# Altium PCB ESC_30A.PcbDoc
Units mm, origin at the board's own origin, x right, y up, seen from the top; angles counter-clockwise.
Board outline 42 x 24 mm, 4 copper layers (Top Layer, Signal Layer 1, Internal Plane 1, Bottom Layer), stack 1.508 mm thick; 67 components, 44 nets, 188 pads, 82 vias.
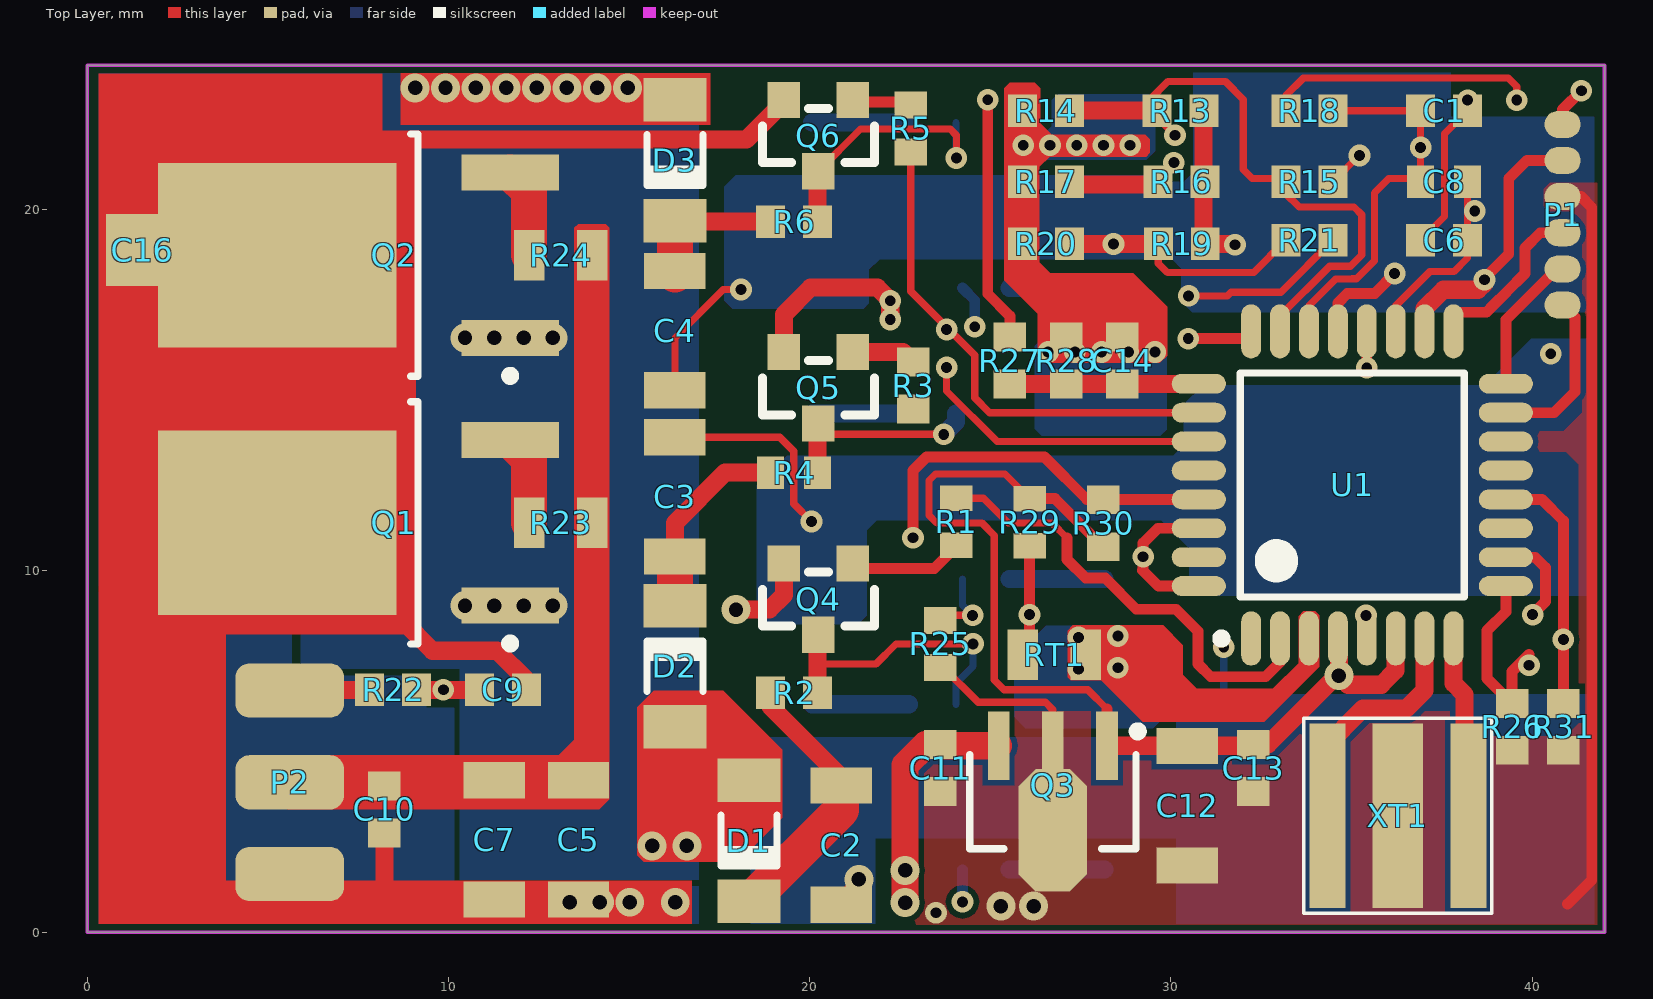
[diagram p0: Top Layer view]
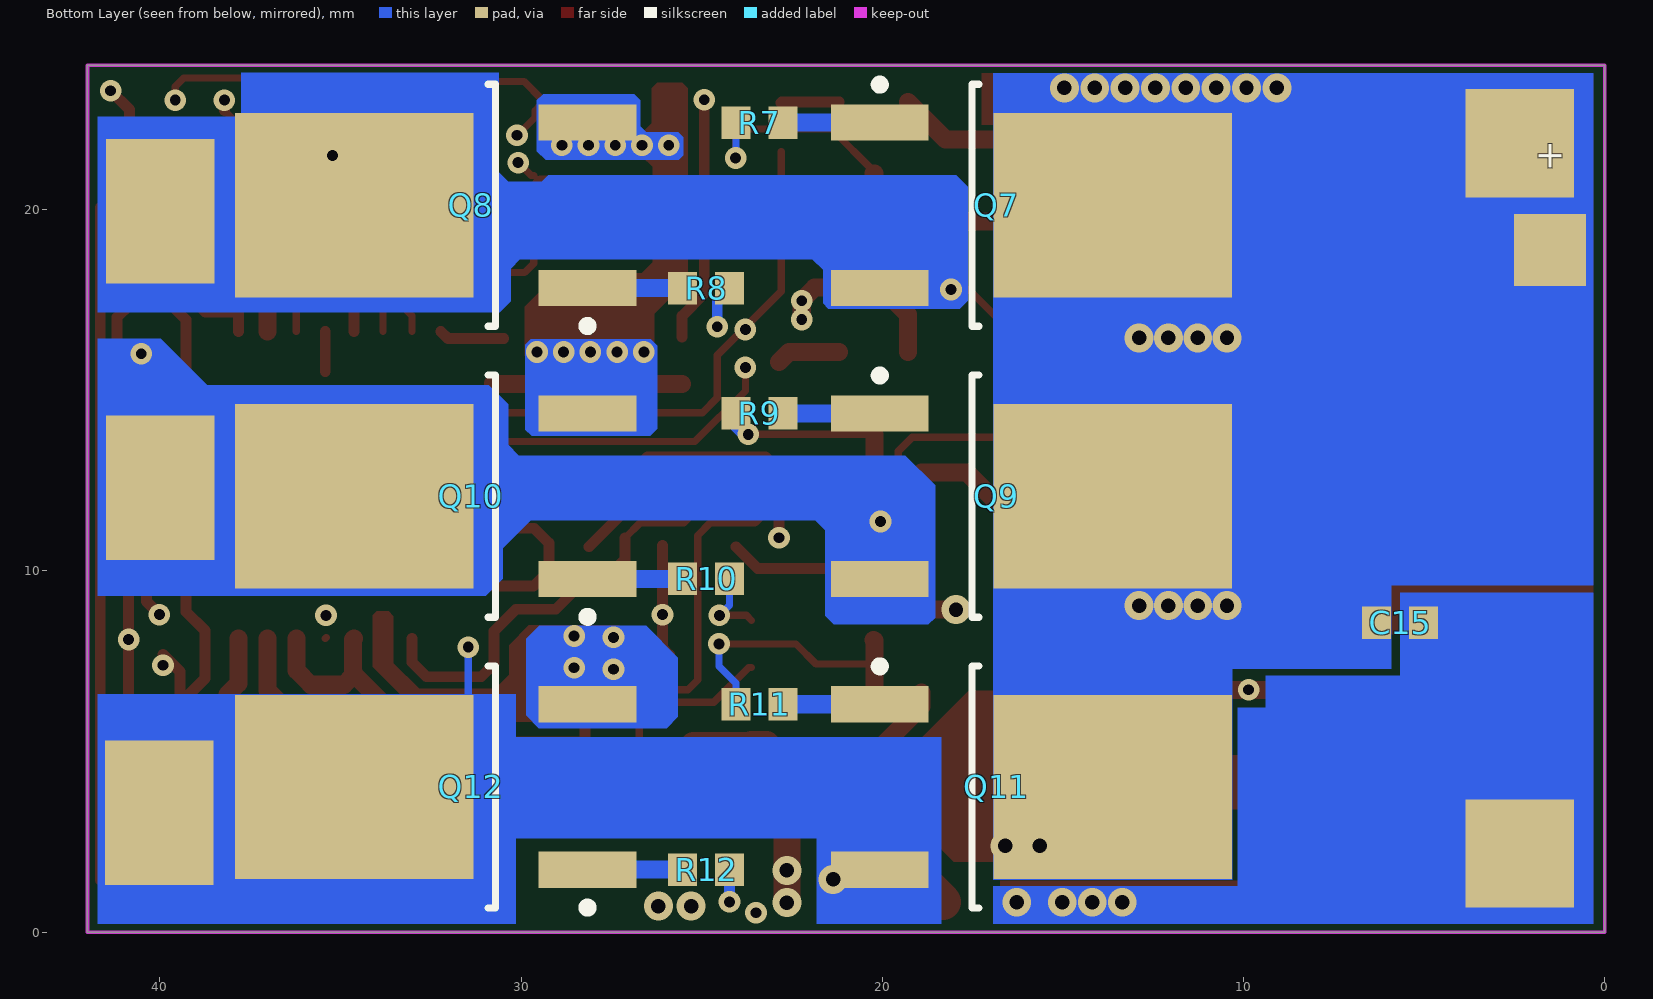
[diagram p1: Bottom Layer view, seen from below]
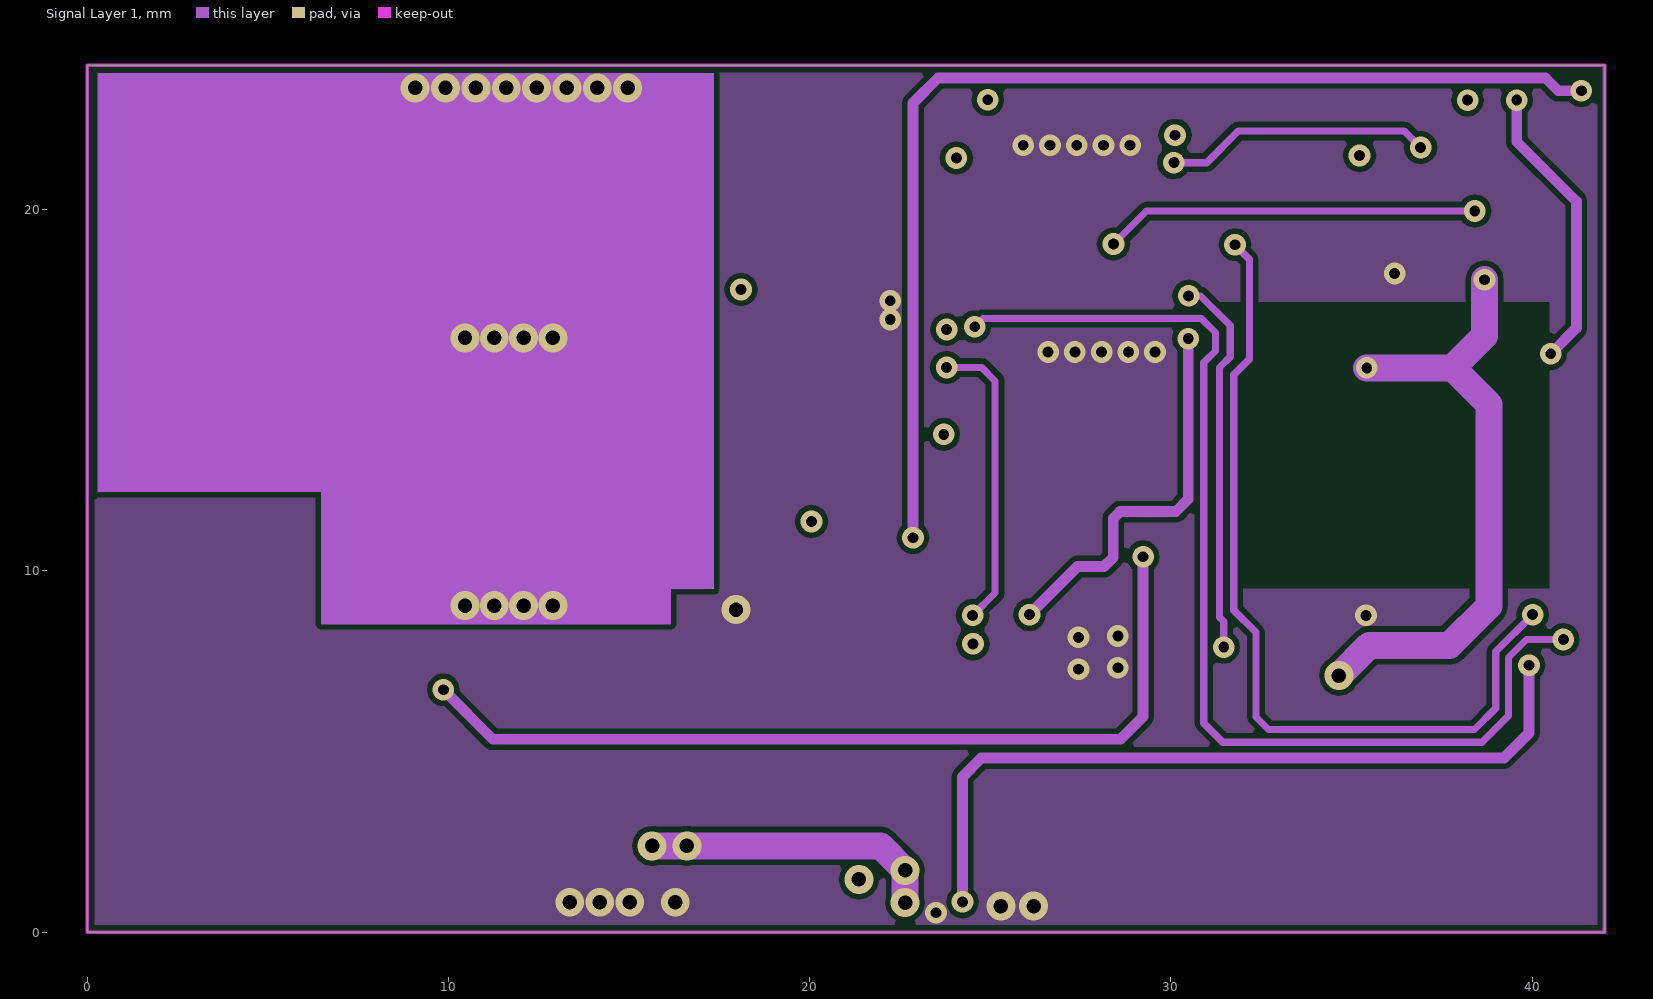
[diagram p2: Signal Layer 1]
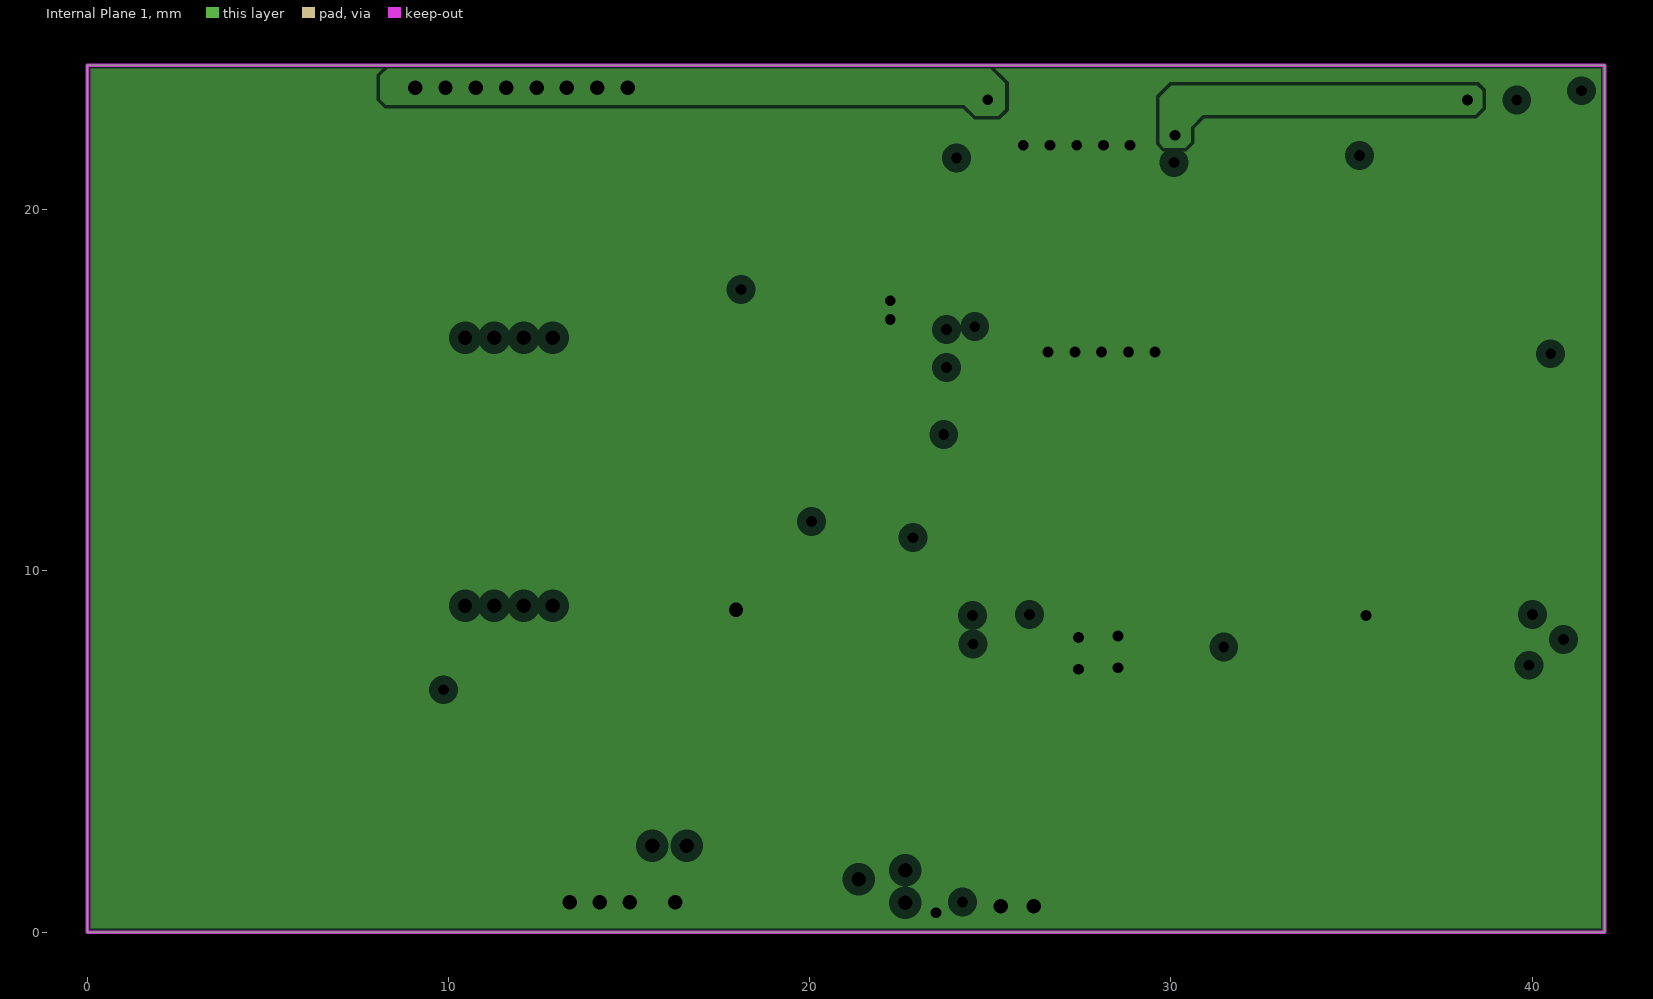
[diagram p3: Internal Plane 1, clearances drawn from the general rule]
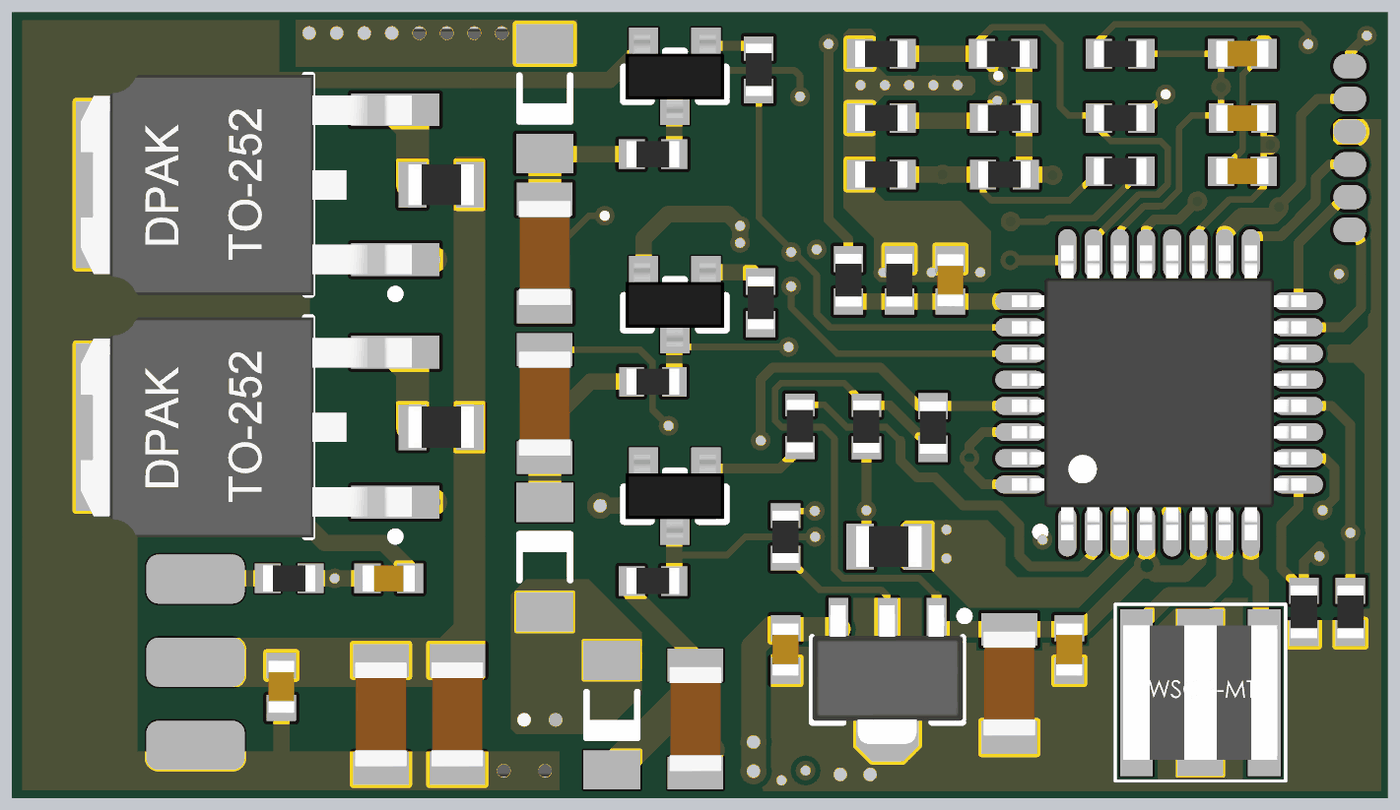
[diagram p4: 3D render of the assembled board from above, using the file's embedded part models]
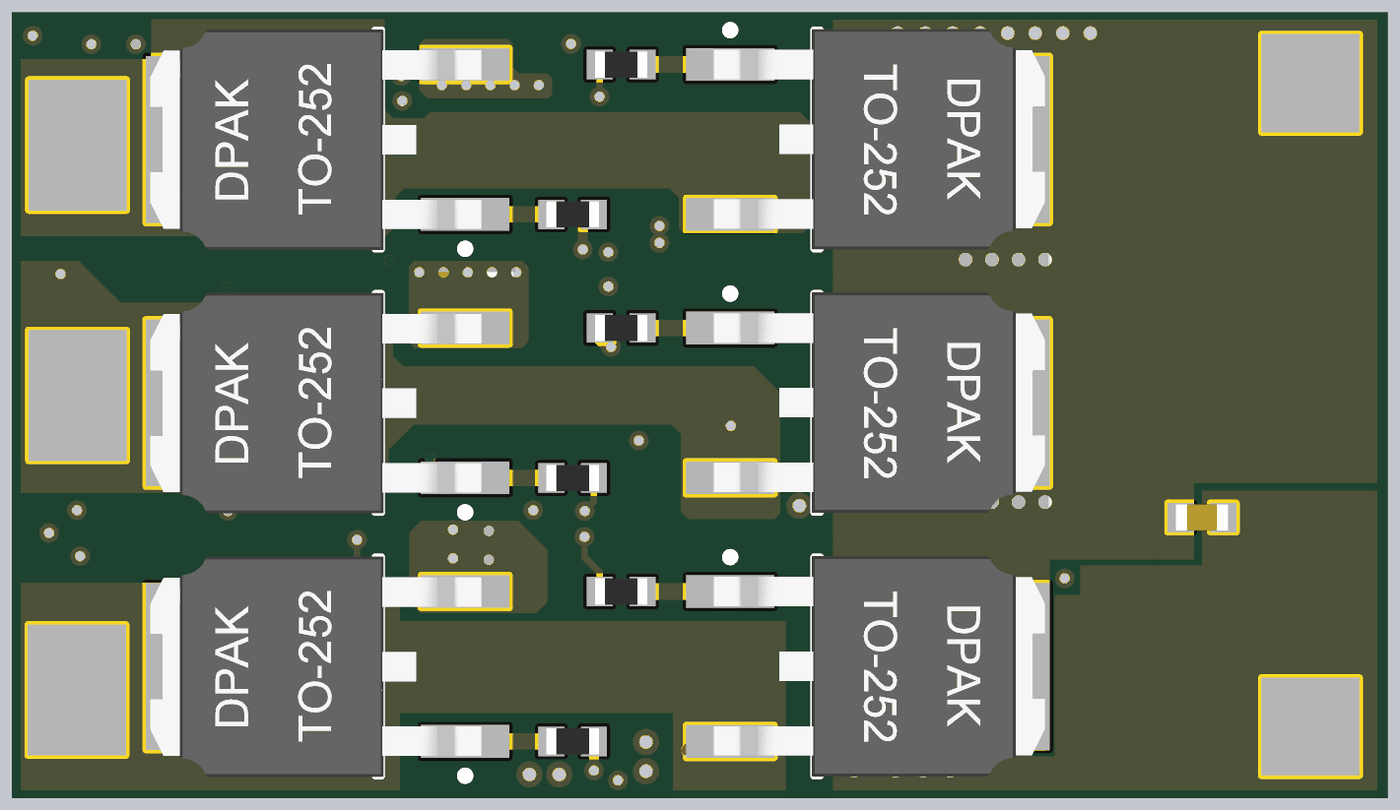
[diagram p5: 3D render of the assembled board from below, using the file's embedded part models]

## Layer stack, top to bottom
Top Solder: solder mask 0.015, Solder Resist, Dk 3.5
Top Layer: signal copper 0.018
Dielectric 1: prepreg 0.2, 7628H, Dk 4.2
Signal Layer 1: signal copper 0.036
Dielectric 3: core 1, FR-4, Dk 4.2
Internal Plane 1: plane copper 0.036, net GND
Dielectric 2: prepreg 0.2, 7628H, Dk 4.2
Bottom Layer: signal copper 0.018
Bottom Solder: solder mask 0.015, Solder Resist, Dk 3.5

## Board outline
0,0 42,0 42,24 0,24

## Design rules (kind name [scope] priority, off if disabled: settings)
BoardOutlineClearance [All] p1: gap=0.2 ignorepadtopadclearanceinfootprint=FALSE
Clearance [All] p1: gap=0.152 ignorepadtopadclearanceinfootprint=FALSE
PlaneClearance [All] p1: clearance=0.25
PlaneConnect [All] p1: planeconnectstyle=Direct reliefexpansion=0.508 reliefentries=4 reliefconductorwidth=0.254 reliefairgap=0.254
PolygonConnect [All] p1: connectstyle=Direct reliefconductorwidth=0.254 reliefentries=4 polygonreliefangle="90 Angle" airgapwidth=0.254
RoutingVias [All] p1: holewidth=0.3 width=0.6 viastyle="Through Hole" minholewidth=0.3 minwidth=0.6 maxholewidth=0.4 maxwidth=0.8
SolderMaskExpansion [All] p1: expansion=0.102
Width [All] p1 off: maxlimit=0.254 minlimit=0.254 preferedwidth=0.254
28 further rules are at their usual default settings.

## Components (designator, comment, footprint, x,y, rotation, side; value= is the part's Value field where it differs from the comment)
C1 "1nF" C0603(1608)#1 37.56,22.74 r180 top
C2 "5uF" C1206(3216)#1 20.87,2.41 r90 top
C3 "5uF" C1206(3216)#1 16.27,12.05 r270 top
C4 "5uF" C1206(3216)#2 16.27,16.65 r90 top
C5 "10uF" C1206(3216)#2 13.6,2.557 r90 top
C6 "1nF" C0603(1608)#1 37.56,19.15 r0 top
C7 "10uF" C1206(3216)#2 11.27,2.557 r90 top
C8 "1nF" C0603(1608)#2 37.56,20.775 r0 top
C9 "470pF" C0603(1608)#1 11.51,6.71 r180 top
C10 "100nF" C0603(1608)#1 8.23,3.4 r90 top
C11 "100nF" C0603(1608)#1 23.62,4.54 r90 top
C12 "10uF" C1206(3216)#2 30.45,3.5 r90 top
C13 "100nF" C0603(1608)#1 32.28,4.54 r90 top
C14 "100nF" C0603(1608)#1 28.65,15.82 r270 top
C15 "100nF" C0603(1608)#1 5.67,8.57 r0 bottom
C16 "470uF/25V" RB.2/.4N -9.49,17.13 r0 top
D1 "1N4148W" DIOMELF3515N#1 18.32,2.535 r90 top
D2 "1N4148W" DIOMELF3515N#1 16.27,7.36 r270 top
D3 "1N4148W" DIOMELF3515N#2 16.27,21.37 r90 top
P1 "ISP" SWD-PAD_6 40.84,19.86 r270 top
P2 "CONTROL" "Pin Header 1x3 TH Pitch 2.54mm" 5.61,6.69 r0 top
Q1 "L78M05CDT" DPAK229P1010X238-3N 7.51,11.33 r180 top
Q2 "L78M05CDT" DPAK229P1010X238-3N 7.51,18.74 r180 top
Q3 "L78L05ABUTR" SOT89-150P409X160-3N 26.73,3.61 r270 top
Q4 "MMBT3904L" SOT23-A 20.24,9.22 r180 top value=BC817
Q5 "MMBT3904L" SOT23-A 20.24,15.07 r180 top value=BC817
Q6 "MMBT3904L" SOT23-A 20.24,22.05 r180 top value=BC817
Q7 "M3016D" DPAK229P1010X238-3N 15.87,20.12 r180 bottom value=DMN10H099SK3-13
Q8 "M3016D" DPAK229P1010X238-3N 32.36,20.12 r0 bottom value=DMN10H099SK3-13
Q9 "M3016D" DPAK229P1010X238-3N 15.87,12.07 r180 bottom value=DMN10H099SK3-13
Q10 "M3016D" DPAK229P1010X238-3N 32.36,12.07 r0 bottom value=DMN10H099SK3-13
Q11 "M3016D" DPAK229P1010X238-3N 15.87,4.02 r180 bottom value=DMN10H099SK3-13
Q12 "M3016D" DPAK229P1010X238-3N 32.36,4.02 r0 bottom value=DMN10H099SK3-13
R1 "4K7" R0603(1608)#1 24.06,11.36 r270 top
R2 "2K2" R0603(1608)#2 19.57,6.63 r0 top
R3 "4K7" R0603(1608)#2 22.86,15.13 r90 top
R4 "2K2" R0603(1608)#3 19.57,12.72 r0 top
R5 "4K7" R0603(1608)#3 22.8,22.25 r90 top
R6 "2K2" R0603(1608)#2 19.57,19.67 r0 top
R7 "100R" R0603(1608)#2 23.4,22.41 r180 bottom
R8 "100R" R0603(1608)#2 24.88,17.83 r0 bottom
R9 "100R" R0603(1608)#2 23.4,14.36 r180 bottom
R10 "100R" R0603(1608)#2 24.88,9.78 r0 bottom
R11 "100R" R0603(1608)#2 23.4,6.31 r180 bottom
R12 "100R" R0603(1608)#2 24.88,1.73 r0 bottom
R13 "3K3" R0603(1608)#2 30.26,22.74 r180 top
R14 "3K3" R0603(1608)#2 26.54,22.74 r0 top
R15 "18K" R0603(1608)#2 33.83,20.775 r180 top
R16 "3K3" R0603(1608)#2 30.29,20.775 r180 top
R17 "3K3" R0603(1608)#2 26.54,20.775 r0 top
R18 "18K" R0603(1608)#2 33.83,22.74 r0 top
R19 "3K3" R0603(1608)#2 30.3,19.05 r180 top
R20 "3K3" R0603(1608)#2 26.54,19.05 r0 top
R21 "18K" R0603(1608)#2 33.83,19.15 r180 top
R22 "220R" R0603(1608)#4 8.47,6.71 r180 top
R23 "0R22" R0805(2012) 13.11,11.33 r0 top
R24 "0R22" R0805(2012) 13.11,18.74 r0 top
R25 "10K" R0603(1608)#3 23.62,7.98 r270 top
R26 "10K" R0603(1608)#2 39.44,5.685 r270 top
R27 "220K" R0603(1608)#2 25.54,15.82 r90 top
R28 "51K" R0603(1608)#2 27.095,15.82 r270 top
R29 "820R" R0603(1608)#1 26.085,11.35 r90 top
R30 "10K" R0603(1608)#2 28.12,11.32 r270 top
R31 "10K" R0603(1608)#2 40.86,5.685 r270 top
RT1 "10K_NTC" R0805(2012) 26.77,7.68 r0 top
U1 "ATMEGA8L-8AUR" TQFP80P900X900X120-32N 35.02,12.38 r90 top
XT1 "AWSCR-16.00MTD-T" XTAL_AWSCR 34.33,3.22 r0 top

## Footprints (in the part's own frame and the unit in brackets; to place one, negate y for a bottom-side part, rotate by r counter-clockwise, add the part's x,y. Pads: shape width x height; smd on the part's side, far side on the other; paste and mask are expansions set on the pad)
C0603(1608)#1 [mm] "Chip Capacitor, Body 1.0x0.5mm, Height 0.6mm, IPC Low Density"
  rect 0.8x0.9 smd: 1(-0.65,0) 2(0.65,0)
  body extent -0.8,-0.4 0.8,0.4, height 0.9
C0603(1608)#2 [mm] "Chip Capacitor, Body 1.0x0.5mm, Height 0.6mm, IPC Low Density"
  rect 0.75x0.9 smd: 1(-0.65,0) 2(0.65,0)
  body extent -0.8,-0.4 0.8,0.4, height 0.9
C1206(3216)#1 [mm] "Chip Capacitor, Body 1.0x0.5mm, Height 0.6mm, IPC Low Density"
  rect 1x1.7 smd mask+0.05: 1(-1.65,0) 2(1.65,0)
  body extent -1.6,-0.8 1.6,0.8, height 1.6
C1206(3216)#2 [mm] "Chip Capacitor, Body 1.0x0.5mm, Height 0.6mm, IPC Low Density"
  rect 1x1.7 smd: 1(-1.65,0) 2(1.65,0)
  body extent -1.6,-0.8 1.6,0.8, height 1.6
DIOMELF3515N#1 [mm] "MELF Diode, 2-Leads, Body 3.50x1.50mm, IPC Medium Density"
  rect 1.2x1.75 smd mask+0.05: 1(-1.675,0) 2(1.675,0)
  silkscreen extent -0.7,-0.78 0.7,0.77, body extent -1.85,-0.8 1.85,0.8, height 1.59
DIOMELF3515N#2 [mm] "MELF Diode, 2-Leads, Body 3.50x1.50mm, IPC Medium Density"
  rect 1.2x1.75 smd: 1(-1.675,0) 2(1.675,0)
  silkscreen extent -0.7,-0.78 0.7,0.77, body extent -1.85,-0.8 1.85,0.8, height 1.59
DPAK229P1010X238-3N [mm] "D-PAK, 3-Pads, Body 6.20x6.71mm (max), IPC Medium Density"
  rect 2.7x1 smd: 1(-4.2,2.29) 3(-4.2,-2.29)
  rect 6.6x5.1 smd: 2(2.25,0)
  silkscreen extent -4.33,-3.35 -1.45,3.46, body extent -4.69,-3.36 5.41,3.37, height 2.37
"Pin Header 1x3 TH Pitch 2.54mm" [mm] "PinHeader 1x1 TH Pitch 2.54mm"
  rrect50% 3x1.5 smd mask+0.05: 1(0,0) 2(0,-2.54) 3(0,-5.08)
R0603(1608)#1 [mm] "Chip Capacitor, Body 1.0x0.5mm, Height 0.6mm, IPC Low Density"
  rect 0.7x0.9 smd: 1(-0.65,0) 2(0.65,0)
  body extent -0.8,-0.4 0.8,0.4, height 0.45
R0603(1608)#2 [mm] "Chip Capacitor, Body 1.0x0.5mm, Height 0.6mm, IPC Low Density"
  rect 0.8x0.9 smd: 1(-0.65,0) 2(0.65,0)
  body extent -0.8,-0.4 0.8,0.4, height 0.45
R0603(1608)#3 [mm] "Chip Capacitor, Body 1.0x0.5mm, Height 0.6mm, IPC Low Density"
  rect 0.75x0.9 smd: 1(-0.65,0) 2(0.65,0)
  body extent -0.8,-0.4 0.8,0.4, height 0.45
R0603(1608)#4 [mm] "Chip Capacitor, Body 1.0x0.5mm, Height 0.6mm, IPC Low Density"
  rect 0.8x0.9 smd mask+0.05: 1(-0.65,0) 2(0.65,0)
  body extent -0.8,-0.4 0.8,0.4, height 0.45
R0805(2012) [mm] "Chip Capacitor, Body 1.0x0.5mm, Height 0.6mm, IPC Low Density"
  rect 0.85x1.4 smd: 1(-0.875,0) 2(0.875,0)
  body extent -1,-0.62 1,0.63, height 0.6
RB.2/.4N [mm]
  rect 2x2 smd far side: 1(11.01,1.75)
  rect 2x2 smd: 2(11.01,1.75)
  body extent -0.65,-12.66 9.35,1.84, height 4.25
SOT23-A [mm] "SOT-23; 3 Leads; Body 3.0 x 2.5 mm, inc. leads (LxW max), Alternate Lead Configuration"
  rect 0.9x1 smd mask+0.05: 1(-0.953,-0.988) 2(0.954,-0.988) 3(0,0.988)
  silkscreen extent -1.55,-0.75 1.55,0.75, body extent -1.5,-1.27 1.5,1.27, height 1.1
SOT89-150P409X160-3N [mm] "SOT89, 3-Leads, Body 4,5x2,4mm (max), Pitch 1,50mm, Lead Span 4,1mm, IPC Medium Density"
  rect 1.9x0.6 smd: 1(-1.55,1.5) 3(-1.55,-1.5)
  rect 1.6x0.6 smd: 2(-1.7,0)
  oct 3.4x1.9 smd: 2(0.79,0)
  silkscreen extent -2.07,-2.3 1.3,2.48, body extent -2.29,-2.3 1.96,2.3, height 1.59
SWD-PAD_6 [mm]
  oval 0.75x1 smd: 1(-2.5,0) 2(-1.5,0) 3(-0.5,0) 4(0.5,0) 5(1.5,0) 6(2.5,0)
TQFP80P900X900X120-32N [mm] "TQFP, 32-Leads, Body 7.00x7.00mm, Pitch 0.80mm, IPC Medium Density"
  oval 1.5x0.55 smd: 1(-4.25,2.8) 2(-4.25,2) 3(-4.25,1.2) 4(-4.25,0.4) 5(-4.25,-0.4) 6(-4.25,-1.2) 7(-4.25,-2) 8(-4.25,-2.8) 17(4.25,-2.8) 18(4.25,-2) 19(4.25,-1.2) 20(4.25,-0.4) 21(4.25,0.4) 22(4.25,1.2) 23(4.25,2) 24(4.25,2.8)
  oval 0.55x1.5 smd: 9(-2.8,-4.25) 10(-2,-4.25) 11(-1.2,-4.25) 12(-0.4,-4.25) 13(0.4,-4.25) 14(1.2,-4.25) 15(2,-4.25) 16(2.8,-4.25) 25(2.8,4.25) 26(2,4.25) 27(1.2,4.25) 28(0.4,4.25) 29(-0.4,4.25) 30(-1.2,4.25) 31(-2,4.25) 32(-2.8,4.25)
  silkscreen extent -4.37,-3.1 3.1,3.75, body extent -4.5,-4.5 4.5,4.5, height 1.2
XTAL_AWSCR [mm]
  rect 1x5.1 smd mask+0.05: 1(0,0) 3(3.9,0)
  rect 1.4x5.1 smd mask+0.05: 2(1.95,0)
  silkscreen extent -0.65,-2.7 4.55,2.7, body extent -0.4,-2.05 4.3,2.06, height 1.51

## Part data
C1 C2 C3 C4 C5 C6 C7 C8 C9 C10 C11 C12 C13 C14 C15: library part Cap, "Capacitor"
C16: library part "Cap Pol1", "CAP ALUM 470UF 20% 25V RADIAL"
D1 D2 D3: library part Diode, "Default Diode", Code_JEDEC=DO-214-AB, LatestRevisionDate=17-Jul-2002, LatestRevisionNote="Re-released for DXP Platform.", PackageDescription="DO-214-AB/SMC; 2 C-Bend Leads; Body 7.9 x 5.9 mm, inc. leads (LxW)", PackageReference=SMC, PackageVersion=Sep-1996, Published=8-Jun-2000, Publisher="Altium Limited"
P1: library part "Header 6", "Header, 6-Pin", LatestRevisionDate=17-Jul-2002, LatestRevisionNote="Re-released for DXP Platform.", Publisher="Altium Limited"
P2: library part "Header 3", "Header, 3-Pin", LatestRevisionDate=17-Jul-2002, LatestRevisionNote="Re-released for DXP Platform.", Publisher="Altium Limited"
Q1 Q2: library part 78M05, "IC REG LINEAR 5V 500MA DPAK"
Q3: library part 78L05, "IC REG LINEAR 5V 100MA SOT89-3"
Q4 Q5 Q6: "TRANS NPN 40V 0.2A SOT23", ComponentLink4Description=BC817-40, ComponentLink5Description=BC817-40LT1G, DepoStok=48430.00000, EK1=45V, EK2=500mA, Kilif=SOT-23, Marka_1=PHILIPS, Marka_2=NXP, Marka_3=On-Semiconductor, Max_Fiyat=0.100, Min_Fiyat=0.029, ModelNo_1=BC817-40, ModelNo_2=BC817-40, ModelNo_3=BC817-40LT1G, Montaj=SMD, Ongoru_Fiyat=0.032, Ort_Fiyat=0.052, Sinif=TRANS, Stok Kodu=265402, Tipi=NPN
Q7 Q8 Q9 Q10 Q11 Q12: "N-Ch 30V Fast Switching MOSFETs", ComponentLink3Description=DMN10H099SK3-13, DepoStok=44.00000, EK1=100V, EK2=17A, Kilif=D-PAK, Marka_1=DIODES, Max_Fiyat=1.488, Min_Fiyat=1.488, ModelNo_1=DMN10H099SK3-13, Montaj=SMD, Ort_Fiyat=1.488, Sinif=TRANS, Stok Kodu=266751, Tipi=N-MOS
R1 R2 R3 R4 R5 R6 R7 R8 R9 R10 R11 R12 R13 R14 R15 R16 R17 R18 R19 R20 R21 R22 R23 R24 R25 R26 R27 R28 R29 R30 R31: library part R, "Resistor"
RT1: library part "Res Thermal", "Thermistor", Code_IPC=RESC2012, LatestRevisionDate=29-May-2009, LatestRevisionNote="IPC-7351 Footprint Added.", PackageDescription="Chip Resistor 0805 Case Size", PackageReference=6-0805, PackageVersion=Mar-2003, Published=24-Mar-1999, Publisher="Altium Limited"
U1: library part ATMEGA8L, "IC MCU 8BIT 8KB FLASH 32TQFP"
XT1: library part XTAL_RESONATOR, "CER RES 16.0000MHZ 22PF SMD"

## Free pads (board coordinates)
  rect 3x3 smd far side: 1(2.36,2.18) 1(2.36,21.84)
  rect 3x4 smd far side: 1(39.99,12.3) 1(39.99,19.95) 1(40.01,3.3)

## Via types
v1: diameter 0.6, hole 0.3, Top Layer to Bottom Layer, tented both sides, 43 vias
v2: diameter 0.8, hole 0.4, Top Layer to Bottom Layer, tented both sides, 28 vias
v3: diameter 0.6, hole 0.3, Top Layer to Signal Layer 1, tented both sides, 10 vias
v4: diameter 0.8, hole 0.4, Top Layer to Signal Layer 1, tented both sides, 1 vias

## Nets (pads, with @x,y where several pads share a name; then routed paths per layer and width w, separated by ;. In a path a pad name is that pad's centre, name@x,y a point inside that pad or via, vN(x,y) a via of type N, cw(c..) or ccw(c..) an arc to the next point about the centre after c; other vN are vias at no path point)
+5V: C12.2 C13.2 P1.2 Q3.1 R29.2 R30.2 U1.4 U1.6 U1.18 U1.20 | length 53.6
  Top Layer w0.2: R29.2 25.405,12.68 23.48,12.68 23.3,12.5 23.3,11.539 23.496,11.343 23.507,11.343 23.52,11.33 24.761,11.33 25.11,10.981 25.11,6.984 25.38,6.714 27.696,6.714 28.23,6.18
  Top Layer w0.3: R29.2@26.235,12 26.79,12 R30.2 ; Q3.1 28.23,6.18 ; v3@35.42,15.52 v3(35.42,15.62) U1.20 ; v3(38.68,18.06) 38.68,18.103 39.35,18.773 39.35,20.86 39.85,21.36 P1.2
  Top Layer w0.5: Q3.1 30.45,5.16 32.25,5.16 C13.2 32.678,5.19 34.588,7.1 v4(34.65,7.1) ; U1.4 34.65,8.1 v4(34.65,7.1) ; U1.6 36.22,7.25 35.82,6.85 34.902,6.85 34.652,7.1 v4(34.65,7.1) ; U1.18 37.02,17.262 37.54,17.782 38.502,17.782 v3@38.68,17.96
  Signal Layer 1 w0.75: v4(34.65,7.1) 35.49,7.94 37.71,7.94 38.8,9.03 38.8,14.61 37.79,15.62 ; v3(35.42,15.62) 37.79,15.62 ; v3(38.68,18.06) 38.68,16.51 37.79,15.62
A+: R5.1 U1.26 | length 13.9
  Top Layer w0.2: R5.1 22.8,17.74 24.57,15.97 24.57,14.79 24.98,14.38 U1.26
  other v1: 23.79,16.68
A-: R8.1 R31.1 U1.12 | length 38.3
  Top Layer w0.3: U1.12 40.27,11.98 40.86,11.39 v1(40.86,8.1) R31.1
  Signal Layer 1 w0.2: v1(24.57,16.76) 24.8,16.99 30.84,16.99 31.23,16.6 31.23,16.09 30.908,15.768 30.908,5.782 31.432,5.258 38.608,5.258 39.342,5.992 39.342,7.603 39.839,8.1 v1(40.86,8.1)
  Bottom Layer w0.3: R8.1 24.57,17.49 v1(24.57,16.76) v1@24.6,16.73
ADC1: R29.1 RT1.1 U1.24 | length 15.7
  Top Layer w0.3: RT1.1 26.085,7.87 v1(26.085,8.79) R29.1 ; v3(30.48,16.43) 32.02,16.43 U1.24
  Signal Layer 1 w0.3: v1(26.085,8.79) 27.415,10.12 28.15,10.12 28.4,10.37 28.4,11.45 28.59,11.64 30.13,11.64 30.48,11.99 v3(30.48,16.43)
ADC2: C14.2 R27.1 R28.2 U1.25 | length 5.2
  Top Layer w0.5: R27.1 R28.2 C14.2 30.76,15.17 U1.25
B+: R3.1 U1.28
B-: R10.1 R25.1 U1.27 | length 18.5
  Top Layer w0.2: R25.1 23.76,8.77 v1(24.51,8.77) v1@24.52,8.78 ; v1(23.79,15.63) 23.79,14.98 25.19,13.58 U1.27
  Signal Layer 1 w0.2: v1(23.79,15.63) 24.76,15.63 25.13,15.26 25.13,9.39 v1(24.51,8.77)
  Bottom Layer w0.2: R10.1 24.23,9.05 v1(24.51,8.77)
C+: R1.1 U1.2 | length 12.7
  Top Layer w0.2: R1.1 24.81,12.01 25.49,11.33 26.7,11.33 27.12,10.91
  Top Layer w0.3: 27.12,10.91 27.12,10.32 27.64,9.8 28.18,9.8 29.04,8.94 30.14,8.94 30.75,8.33 30.75,7.42 31.1,7.07 32.62,7.07 33.02,7.47 U1.2
C-: R12.1 R26.1 U1.9 | length 27.7
  Top Layer w0.3: U1.9 39.27,8.87 38.75,8.35 38.75,7.025 R26.1 39.44,7.22 39.91,7.69
  Signal Layer 1 w0.3: v1(24.23,0.84) 24.23,4.3 24.75,4.82 39.22,4.82 39.91,5.51 v1(39.91,7.39)
  Bottom Layer w0.3: v1(24.23,0.84) R12.1
CENTER: R13.1 R16.1 R19.1 U1.10 | length 30.3
  Top Layer w0.2: v3@31.75,19.05 v3(31.77,19.03)
  Top Layer w0.3: U1.10 40.08,10.38 40.37,10.09 40.37,9.15 v1(40.01,8.79)
  Top Layer w0.5: R19.1@30.9,19.32 R13.1@30.9,22.44 ; R19.1 v3@31.75,19.05
  Signal Layer 1 w0.2: v3(31.77,19.03) 32.17,18.63 32.17,15.86 31.74,15.43 31.74,8.91 32.35,8.3 32.35,5.96 32.7,5.61 38.4,5.61 38.99,6.2 38.99,7.77 v1(40.01,8.79)
EXT_+5V: C5.2 C7.2 C10.2 P2.2 R23.2 R24.2
GND: C5.1 C7.1 C9.1 C10.1 C11.1 C12.1 C13.1 C14.1 C15.1 C16.2 P1.3 P2.3 pad.1@2.36,2.18 Q1.2 Q2.2 Q3.2 Q4.2 Q5.2 Q6.2 Q8.3 Q10.3 Q12.3 R14.1 R17.1 R20.1 R25.2 R26.2 R28.1 R31.2 RT1.2 U1.3 U1.5 U1.21 XT1.2 | length 52.8
  Top Layer w0.2: R25.2 23.695,7.33 24.663,6.362 26.528,6.362 26.73,6.16 Q3.2@26.73,5.31 ; U1.5@35.39,8.16 U1.5
  Top Layer w0.3: U1.21 34.62,17.42 34.88,17.68 35.179,17.68 35.181,17.682 35.64,17.682 v3(36.19,18.232) ; P1.3 41.35,20.36 41.648,20.062 41.648,1.448 40.98,0.78
  Top Layer w0.5: 7.96,21.91 7.96,21.938 18.247,21.938 Q6.2@19.287,22.978 ; 8.23,1.1 C10.1 ; 8.74,8.61 9.56,7.79 11.35,7.79 12.16,6.98 C9.1 ; v2(17.96,8.93) 18.88,8.93 19.287,9.337 Q4.2 ; Q5.2 19.287,17.097 20.03,17.84 21.87,17.84 v1(22.23,17.48) v1(22.23,16.96)
  other v1: 23.496,0.54 27.44,7.28 28.53,7.32 27.44,8.16 28.53,8.2 35.4,8.77 26.6,16.06 27.34,16.06 28.08,16.06 28.82,16.06 29.56,16.06 25.91,21.78 26.65,21.78 27.39,21.78 28.13,21.78 28.87,21.78
  other v2: 25.29,0.72 26.2,0.72 13.36,0.83 14.19,0.83 15.02,0.83 16.28,0.83
MISO: P1.5 U1.16 | length 3.9
  Top Layer w0.3: U1.16 39.27,16.95 40.68,18.36 P1.5
MOSI: P1.6 U1.15 | length 4.7
  Top Layer w0.3: U1.15 40.6,14.38 41.18,14.96 41.18,17.02 P1.6
NetC2_2: C2.2 D1.1 R2.1 | length 7.7
  Top Layer w0.5: R2.1 18.92,6.25 20.87,4.3 C2.2
  Top Layer w1: D1.1@18.32,0.835 20.87,3.385 C2.2
NetC3_2: C3.2 D2.1 R4.1 | length 5.5
  Top Layer w0.5: C3.2 16.27,11.33 17.66,12.72 R4.1
  Top Layer w1: D2.1 C3.2
NetC4_2: C4.2 D3.1 R6.1 | length 4.1
  Top Layer w0.5: D3.1@16.27,19.665 16.27,19.67 R6.1
  Top Layer w1: C4.2@16.27,18.21 D3.1@16.27,19.665
NetP2_1: P2.1 R22.2 | length 1.3
  Top Layer w0.5: P2.1@6.51,6.69 6.91,6.69 6.93,6.71 R22.2
NetQ1_3: Q1.3 R23.1 | length 2.5
  Top Layer w1: Q1.3 12.235,13.095 R23.1
NetQ2_3: Q2.3 R24.1 | length 2.5
  Top Layer w1: Q2.3 12.235,20.505 R24.1
NetQ4_1: Q4.1 R1.2 | length 3.1
  Top Layer w0.3: Q4.1@21.193,10.068 23.448,10.068 R1.2@24.05,10.67
NetQ4_3: Q4.3 R2.2 R11.1 | length 7.9
  Top Layer w0.2: 20.22,7.42 21.83,7.42 22.39,7.98 v1(24.52,7.98)
  Top Layer w0.5: R2.2 20.22,7.42 20.22,8.072 Q4.3@20.24,8.092
  Bottom Layer w0.2: R11.1 24.05,6.89 24.52,7.36 v1(24.52,7.98)
NetQ5_1: Q5.1 R3.2 | length 1.8
  Top Layer w0.5: Q5.1 22.582,16.058 R3.2
NetQ5_3: Q5.3 R4.2 R9.1 | length 5.3
  Top Layer w0.2: Q5.3@20.22,13.77 20.23,13.78 v1(23.71,13.78)
  Top Layer w0.5: R4.2 Q5.3@20.22,13.77
  Bottom Layer w0.5: v1(23.71,13.78) 24.05,14.12 R9.1
NetQ6_1: Q6.1 R5.2 | length 1.6
  Top Layer w0.3: Q6.1@21.193,22.978 22.782,22.978 R5.2@22.8,22.96
NetQ6_3: Q6.3 R6.2 R7.1 | length 7.3
  Top Layer w0.2: Q6.3 21.408,22.23 23.89,22.23 24.06,22.06 v1(24.06,21.43)
  Top Layer w0.5: R6.2 20.22,21.002 Q6.3@20.24,21.002
  Bottom Layer w0.2: R7.1 24.05,21.44 v1(24.06,21.43)
NetQ7_1: Q7.1 R7.2 | length 2.7
  Bottom Layer w0.5: Q7.1 R7.2
NetQ8_1: Q8.1 R8.2 | length 2.6
  Bottom Layer w0.5: R8.2 Q8.1
NetQ9_1: Q9.1 R9.2 | length 2.7
  Bottom Layer w0.5: Q9.1 R9.2
NetQ10_1: Q10.1 R10.2 | length 2.6
  Bottom Layer w0.5: R10.2 Q10.1
NetQ11_1: Q11.1 R11.2 | length 2.7
  Bottom Layer w0.5: Q11.1 R11.2
NetQ12_1: Q12.1 R12.2 | length 2.6
  Bottom Layer w0.5: R12.2 Q12.1
NetU1_7: U1.7 XT1.1 | length 7
  Top Layer w0.5: XT1.1@34.23,3.02 34.23,5.1 35.32,6.19 36.52,6.19 37.02,6.69 U1.7
NetU1_8: U1.8 XT1.3 | length 5.2
  Top Layer w0.5: U1.8 37.82,6.89 38.13,6.58 XT1.3@38.13,3.02
PHASE_A: C4.1 pad.1@39.99,19.95 Q7.3 Q8.2 R15.1 | length 7
  Top Layer w0.2: C4.1@16.27,14.91 16.27,16.45 17.61,17.79 v1(18.1,17.79) ; R15.1 v1@35.205,21.5 ; v1@35.205,21.67 v1@35.22,21.67
  Bottom Layer w0.2: v1(18.1,17.79) 20.03,17.79 Q7.3
  other v1: 35.22,21.5
PHASE_B: C3.1 pad.1@39.99,12.3 Q9.3 Q10.2 R18.1 | length 21.4
  Top Layer w0.2: C3.1 19.17,13.7 19.56,13.31 19.56,11.86 v1(20.05,11.37) ; R18.1@33.18,22.44 33.18,23.16 33.66,23.64 39.34,23.64 39.57,23.41 v1@39.57,23.09
  Top Layer w0.3: v1@39.57,22.99 39.57,23.09 v1@39.58,23.08
  Signal Layer 1 w0.3: v1@39.57,22.99 39.57,21.88 41.22,20.23 41.22,16.72 v1(40.51,16.01)
  other v1: 39.57,23.03
PHASE_C: C2.1 pad.1@40.01,3.3 Q11.3 Q12.2 R21.1 | length 21.7
  Top Layer w0.2: v3(30.488,17.612) 31.56,17.612 31.66,17.712 33.042,17.712 R21.1
  Top Layer w0.3: C2.1 20.87,0.97 v2(21.36,1.46)
  Signal Layer 1 w0.2: v3(30.488,17.612) 30.818,17.612 31.64,16.79 31.64,15.93 31.34,15.63 31.34,8.72 31.46,8.6 v1(31.46,7.89)
  Bottom Layer w0.2: v1(31.46,7.89) 31.46,6.47 33.91,4.02 Q12.2
PWM_IN: C9.2 R22.1 U1.30 U1.32 | length 30.6
  Top Layer w0.3: U1.32 29.65,9.58 29.21,10.02 29.23,10.04 v3(29.23,10.39) 29.23,10.77 29.64,11.18 U1.30
  Top Layer w0.5: R22.1 v1(9.86,6.71) C9.2
  Signal Layer 1 w0.3: v1(9.86,6.71) 11.23,5.34 28.6,5.34 29.23,5.97 v3(29.23,10.39)
RESET: P1.1 R30.1 U1.29 | length 42.5
  Top Layer w0.3: v1(22.86,10.92) 22.86,12.78 23.23,13.15 26.5,13.15 27.68,11.97 R30.1 28.13,11.98 U1.29 ; P1.1 40.84,22.77 v1(41.36,23.29)
  Signal Layer 1 w0.3: v1(22.86,10.92) 22.86,22.95 23.558,23.648 40.362,23.648 40.72,23.29 v1(41.36,23.29) v1@41.35,23.3
SCK: P1.4 U1.17 | length 4.9
  Top Layer w0.3: U1.17 37.82,17.16 38.73,17.16 38.928,17.358 38.929,17.358 39.282,17.711 39.282,17.712 39.802,18.232 39.802,18.942 40.22,19.36 P1.4
SENSE_A: C1.1 C6.1 R13.2 R14.2 R15.2 U1.23 | length 21.6
  Top Layer w0.2: R13.2@29.41,22.44 29.41,22.74 29.41,23.04 29.92,23.55 31.5,23.55 32,23.05 32,21.11 32.25,20.86 33.18,20.86 R15.2 33.18,20.44 33.55,20.07 35.067,20.07 35.28,19.857 35.28,18.744 34.972,18.436 34.869,18.436 34.867,18.434 34.394,18.434 33.02,17.06 U1.23 ; R13.2 29.61,22.55 v1@30.11,22.05 ; C6.1 37.57,19.81 37.57,22.1 C1.1
  Top Layer w0.3: C1.1 v1(38.21,23.03)
  Top Layer w0.5: R14.2 R13.2@29.41,22.74
  other v1: 30.11,22.06
SENSE_B: C1.2 C8.1 R16.2 R17.2 R18.2 U1.22 | length 20.6
  Top Layer w0.2: R16.2@29.64,20.945 29.715,20.945 v1@30.069,21.299 ; U1.22 33.82,17.342 34.56,18.082 35.012,18.082 35.014,18.084 35.134,18.084 35.634,18.584 35.634,20.464 36.03,20.86 36.91,20.86 C1.2@36.91,22.44 ; R18.2 C1.2 ; C1.2@36.9,22.44 C1.2@36.91,22.45
  Top Layer w0.5: R17.2@27.19,20.69 R16.2@29.44,20.69
  Signal Layer 1 w0.2: v1(30.08,21.3) 30.99,21.3 31.87,22.18 36.45,22.18 v3(36.91,21.72)
SENSE_C: C6.2 C8.2 R19.2 R20.2 R21.2 U1.19 | length 22.5
  Top Layer w0.2: R19.2 29.65,18.51 29.9,18.26 32.29,18.26 R21.2 ; U1.19 36.22,17.343 37.161,18.284 37.834,18.284 38.21,18.66 C6.2 C8.2 C8.2@38.21,20.86
  Top Layer w0.5: R20.2 v3(28.41,19.05) R19.2@29.29,19.05
  Signal Layer 1 w0.2: v3(28.41,19.05) 29.32,19.96 v3(38.41,19.96)
VBAT: C11.2 C15.2 C16.1 D1.2 D2.2 D3.2 pad.1@2.36,21.84 Q1.1 Q2.1 Q3.3 Q7.2 Q9.2 Q11.2 R27.2 | length 21.6
  Top Layer w0.3: v1(24.93,23.04) 24.93,17.67 25.54,17.06 R27.2
  Top Layer w0.75: v2(22.64,0.82) 22.64,4.62 23.21,5.19 C11.2 23.65,5.16 Q3.3
  Signal Layer 1 w0.75: v2@15.64,2.36 15.67,2.39 21.96,2.39 v2(22.64,1.71) v2(22.64,0.82)
  other v2: 15.64,2.39 16.6,2.39 10.46,9.04 11.27,9.04 12.08,9.04 12.89,9.04 10.46,16.45 11.27,16.45 12.08,16.45 12.89,16.45 9.08,23.37 9.92,23.37 10.76,23.37 11.6,23.37 12.44,23.37 13.28,23.37 14.12,23.37 14.96,23.37
pads on no net: U1.1 U1.11 U1.13 U1.14 U1.31

## Polygon pours and split planes (outlines as drawn)
GND on Signal Layer 1 "Signal Layer 1-No Net" (solid, pour order 0): 0,0 42,0 42,24 0,24
GND on Top Layer "Top Layer-GND" (solid, pour order 2): 21.67,0 21.67,3.84 23.95,6.12 38.22,6.12 38.91,5.43 40.93,5.43 41.29,5.79 41.29,12.94 40.93,13.3 38.632,13.3 38.502,13.43 38.502,13.732 38.63,13.86 40.86,13.86 41.39,14.39 41.39,19.68 41.11,19.96 40.45,19.96 40.32,20.09 40.32,20.58 40.48,20.74 41.99,20.74 42,20.75 42,0
GND on Internal Plane 1 (split plane): 41.898,0.102 0.102,0.102 0.102,23.898 8.166,23.898 8.024,23.756 8.013,23.74 8.009,23.72 8.009,23.04 8.013,23.02 8.024,23.004 8.214,22.814 8.23,22.803 8.25,22.799 24.239,22.799 24.534,22.504 24.55,22.493 24.57,22.489 25.24,22.489 25.26,22.493 25.276,22.504 25.496,22.724 25.503,22.734 25.507,22.74 25.511,22.76 25.511,23.51 25.507,23.53 25.496,23.546 25.144,23.898 41.898,23.898
SENSE_A on Internal Plane 1 (split plane): 38.619,23.289 38.619,22.821 38.419,22.621 30.9,22.621 30.88,22.617 30.874,22.613 30.864,22.606 30.564,22.306 30.553,22.29 30.549,22.27 30.549,21.871 30.389,21.711 29.811,21.711 29.681,21.841 29.681,23.109 30.001,23.429 38.479,23.429
VBAT on Internal Plane 1 (split plane): 25.409,23.489 25.409,22.781 25.219,22.591 24.591,22.591 24.296,22.886 24.28,22.897 24.26,22.901 8.271,22.901 8.111,23.061 8.111,23.699 8.31,23.898 25,23.898

## Keep-outs
Keep-Out Layer:
  the board outline again, w0.1

## Other copper
Top Layer:
  rectangle net VBAT: 8.67,22.34 17.26,23.78
  region net GND: 33.53,7.45 32.82,6.74 30.71,6.74 30.33,7.12 30.33,7.94 29.78,8.49 27.28,8.49 27.14,8.35 27.14,7.06 27.23,6.97 28.07,6.97 29.22,5.82 32.58,5.82 34.11,7.35 34.11,8.77 34,8.88 33.66,8.88 33.53,8.75
  region net GND: 26.64,21.47 26.36,21.19 26.36,18.54 26.66,18.24 28.96,18.24 29.89,17.31 29.89,15.96 29.69,15.76 26.48,15.76 26.31,15.93 26.31,17.12 25.39,18.04 25.39,23.36 25.54,23.51 26.23,23.51 26.38,23.36 26.38,22.39 26.7,22.07 29.29,22.07 29.41,21.95 29.41,21.57 29.31,21.47
  region net VBAT: 15.23,2.13 15.41,1.95 18.02,1.95 19.24,3.17 19.24,5.05 17.61,6.68 15.68,6.68 15.23,6.23
  region: 15.12,6.26
  region net EXT_+5V: 13.06,4.9 13.49,5.33 13.49,19.5 13.59,19.6 14.35,19.6 14.45,19.5 14.45,3.68 14.17,3.4 5.56,3.4 5.56,4.9
  region net GND: 8.17,23.76 0.32,23.76 0.32,0.24 16.73,0.24 16.73,1.42 3.84,1.42 3.84,8.25 9.1,8.25 9.1,21.81 8.17,21.81
Signal Layer 1:
  pour cut-out: 40.49,17.45 40.49,9.5 30.79,9.5 30.79,17.45
  region net VBAT: 0.3,23.77 17.35,23.77 17.35,9.5 16.15,9.5 16.15,8.53 6.48,8.53 6.48,12.19 0.3,12.19
Bottom Layer:
  region net GND: 25.97,5.65 25.66,5.96 25.66,7.6 26.54,8.48 29.5,8.48 29.86,8.12 29.86,6 29.51,5.65
  region net PHASE_A: 21.49,17.26 21.64,17.41 21.64,18.33 21.94,18.63 30.03,18.63 30.29,18.37 30.29,17.465 30.595,17.16 41.72,17.16 41.72,22.57 37.742,22.57 37.742,23.79 30.62,23.79 30.62,22.59 30.62,21.04 30.35,20.77 29.43,20.77 29.25,20.95 24.66,20.95 17.95,20.95 17.64,20.64 17.64,17.48 17.86,17.26
  region net PHASE_B: 18.54,12.37 19.36,13.19 30.06,13.19 30.36,13.49 30.36,14.61 30.89,15.14 38.69,15.14 39.97,16.42 41.72,16.42 41.72,9.31 38.76,9.31 30.97,9.31 30.5,9.78 30.5,10.63 29.73,11.4 21.85,11.4 21.58,11.13 21.58,8.76 21.34,8.52 18.73,8.52 18.54,8.71
  region net GND: 26.53,22.14 26.7,22.31 26.7,23.03 26.87,23.2 29.39,23.2 29.56,23.03 29.56,21.62 29.32,21.38 25.63,21.38 25.51,21.5 25.51,22 25.65,22.14
  region net GND: 26.42,13.74 26.23,13.93 26.23,16.23 26.41,16.41 29.73,16.41 29.88,16.26 29.88,13.91 29.71,13.74
  region net PHASE_C: 18.37,5.4 26.37,5.4 30.15,5.4 30.15,6.58 41.72,6.58 41.72,0.24 30.15,0.24 30.15,2.6 21.82,2.6 21.82,0.24 18.37,0.24
  region net GND: 0.32,9.39 0.32,0.24 16.93,0.24 16.93,1.27 10.16,1.27 10.16,6.21 9.39,6.21 9.39,7.1 5.67,7.1 5.67,9.39
  region net VBAT: 16.93,1.45 10.32,1.45 10.32,7.29 5.91,7.29 5.91,9.61 0.32,9.61 0.32,23.78 16.93,23.78
Internal Plane 1 (plane layer: these items are gaps in the copper):
  lines w0.1: 8.06,23.04 8.25,22.85 8.5,22.85 24.26,22.85 24.57,22.54 25.24,22.54 25.46,22.76 25.46,23.51 24.97,24 8.34,24 8.06,23.72 8.06,23.04 ; 29.63,21.82 29.79,21.66 30.41,21.66 30.6,21.85 30.6,22.27 30.9,22.57 38.44,22.57 38.67,22.8 38.67,23.31 38.5,23.48 29.98,23.48 29.63,23.13 29.63,21.82

## Silkscreen, mask and mechanical layers (free items; w line width, h text height)
Mechanical 3:
  drawing of 324 lines, arcs and shapes, not listed

## Text inside footprints (layer, text, board x,y; h text height)
C16: Bottom Overlay "+" at 1.19,21.92 h0.76 r270